# Altium PCB GenericPiHAT 06-1.0.PcbDoc
Units mm, origin at the board's own origin, x right, y up, seen from the top; angles counter-clockwise.
Board outline 65 x 56.5 mm, 2 copper layers (Top Layer, Bottom Layer), stack 1.525 mm thick; 7 components, 32 nets, 62 pads, 0 vias.
Unrouted connection lines stored in the file: 24.
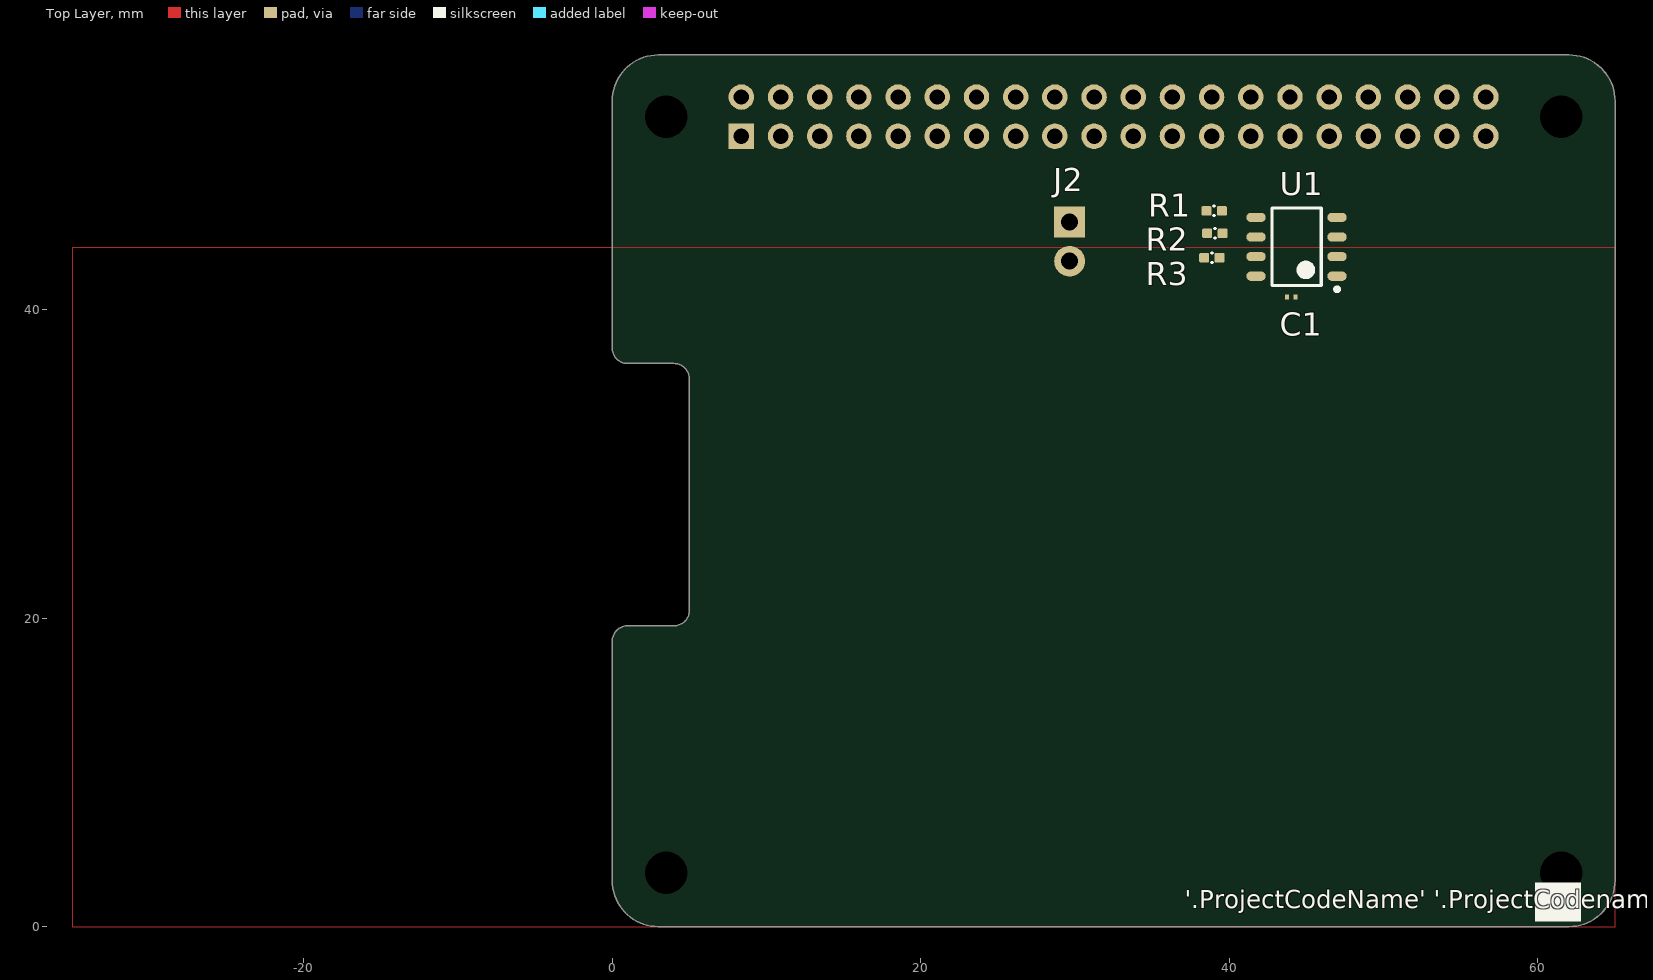
[diagram p0: Top Layer view]
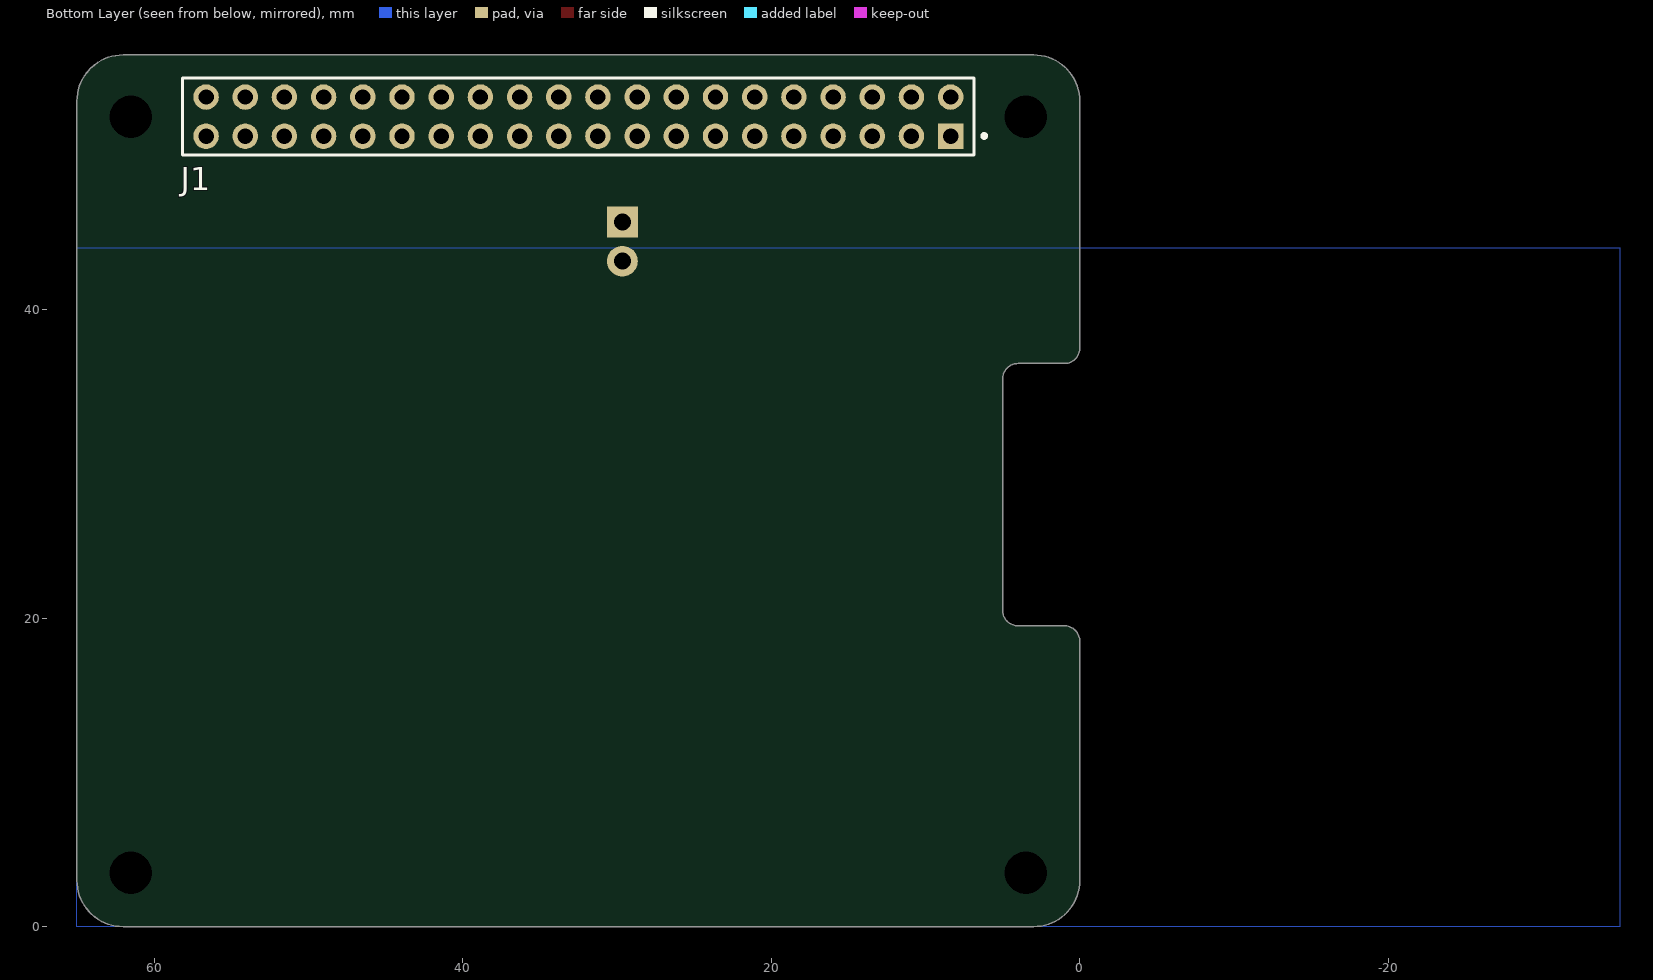
[diagram p1: Bottom Layer view, seen from below]

## Layer stack, top to bottom
Top Solder: solder mask 0.0102, Solder Resist, Dk 3.5
Top Layer: signal copper 0.0356
Dielectric 1: core 1.454, FR-4, Dk 4.2
Bottom Layer: signal copper 0.0356
Bottom Solder: solder mask 0.0102, Solder Resist, Dk 3.5

## Board outline
0,3 0,18.5 cw(c1,18.5) 1,19.5 4,19.5 ccw(c4,20.5) 5,20.5 5,35.5 ccw(c4,35.5) 4,36.5 1,36.5 cw(c1,37.5) 0,37.5 0,53.5 cw(c3,53.5) 3,56.5 62,56.5 cw(c62,53.5) 65,53.5 65,3 cw(c62,3) 62,0 3,0 cw(c3,3)

## Design rules (kind name [scope] priority, off if disabled: settings)
AssemblyTestPointUsage [All] p1: valid=2
BoardOutlineClearance [All] p1: gap=0.3 ignorepadtopadclearanceinfootprint=FALSE except(0: Arc-SplitContinuation Track-SplitContinuation SMDPad-SplitContinuation THPad-SplitContinuation Via-SplitContinuation Fill-SplitContinuation Poly-SplitContinuation Region-SplitContinuation Text-SplitContinuation)
Clearance [All] p1: gap=0.125 ignorepadtopadclearanceinfootprint=FALSE except(0: Arc-Hole Track-Hole SMDPad-Hole THPad-Hole Via-Hole Fill-Hole Poly-Hole Region-Hole Text-Hole)
DiffPairsRouting [All] p1: maxlimit=0.2 minlimit=0.15 mostfreqgap=0.15 toplayer_minwidth=0.15 toplayer_maxwidth=0.2 toplayer_prefwidth=0.15 bottomlayer_minwidth=0.15 bottomlayer_maxwidth=0.2 bottomlayer_prefwidth=0.15 maxuncoupledlength=12.7
FabricationTestPointUsage [All] p1: valid=2 allowmultiple=FALSE
HoleSize [All] p1: absolutevalues=TRUE maxlimit=3 minlimit=0.2 maxpercent=80.000 minpercent=20.000
MinimumSolderMaskSliver [All] p1: minsoldermaskwidth=0.005
PlaneClearance [All] p1: clearance=0.3
PlaneConnect [All] p1: planeconnectstyle=Relief reliefexpansion=0.5 reliefentries=4 reliefconductorwidth=0.2 reliefairgap=0.3
PolygonConnect "PolygonConnect GND" [isVIA] p1: connectstyle=Relief reliefconductorwidth=0.2 reliefentries=4 polygonreliefangle="90 Angle" airgapwidth=0.2
PolygonConnect [All] p2: connectstyle=Relief reliefconductorwidth=0.2 reliefentries=4 polygonreliefangle="90 Angle" airgapwidth=0.2
RoomDefinition "GenericPiHAT 06-1.0" [InComponentClass('GenericPiHAT 06-1.0')] p1: confinementstyle=ConfineIn formatcopy=TRUE lockcomponents=FALSE outline 0,0 65,0 65,56.5 0,56.5
RoutingVias [All] p1: holewidth=0.3 width=0.6 viastyle="Through Hole" minholewidth=0.3 minwidth=0.6 maxholewidth=0.3 maxwidth=0.8
SilkToSilkClearance [All] p1: silktosilkclearance=0.001
SilkToSolderMaskClearance [IsPad] p1: minsilkscreentomaskgap=0.05 clearancetoexposedcopper=TRUE
SolderMaskExpansion [All] p1: expansion=0.075
Width [All] p1: maxlimit=2 minlimit=0.15 preferedwidth=0.15 minimp=50.000000 maximp=50.000000 favimp=50.000000
21 further rules are at their usual default settings.

## Components (designator, comment, footprint, x,y, rotation, side; value= is the part's Value field where it differs from the comment)
C1 "100nF" "TDK 2010" 44.009,40.811 r180 top
J1 "SSW-140-01-G-D" SSW-140-01-G-D 32.5,52.5 r180 bottom
J2 "0.1\" DNF" "Generic 1x2 2.54mm header" 29.645,44.399 r90 top
R1 "3k9" RES0402 39.015,46.394 r0 top
R2 "3k9" RES0402 39.065,44.936 r0 top
R3 "1k" RES0402 38.866,43.354 r0 top
U1 "CAT24C32WI-GT3" ONSC-SOIC-8-751BD-01_L 44.355,44.064 r180 top

## Footprints (in the part's own frame and the unit in brackets; to place one, negate y for a bottom-side part, rotate by r counter-clockwise, add the part's x,y. Pads: shape width x height; smd on the part's side, far side on the other; paste and mask are expansions set on the pad)
"Generic 1x2 2.54mm header" [mm] "1x2 2.54mm  0.1\" header vertial TH header"
  rect 2x2 hole 1.1: 1(1.27,0)
  round 2 hole 1.1: 2(-1.27,0)
  body extent -2.54,-1.27 2.54,1.27, height 8.65
ONSC-SOIC-8-751BD-01_L [mm] "SOIC, 8-Leads, Body 4.90x3.90mm, Pitch 1.27mm, IPC High Density"
  oval 1.25x0.6 smd: 1(-2.625,1.905) 2(-2.625,0.635) 3(-2.625,-0.635) 4(-2.625,-1.905) 5(2.625,-1.905) 6(2.625,-0.635) 7(2.625,0.635) 8(2.625,1.905)
  silkscreen extent -2.75,-2.5 1.6,2.88, body extent -3,-2.5 3,2.5, height 1.75
RES0402 [mm] "Chip Resistor 0402"
  rrect25% 0.65x0.6 smd: 1(-0.5,0) 2(0.5,0)
  silkscreen extent -0.03,-0.3 0.03,0.3, body extent -0.53,-0.28 0.53,0.27, height 0.35
SSW-140-01-G-D [mm]
  rect 1.65x1.65 / inner round 1.65 / far side rect 1.65x1.65 hole 1 mask+0: 1(24.13,-1.27)
  round 1.65 hole 1 mask+0: 2(24.13,1.27) 3(21.59,-1.27) 4(21.59,1.27) 5(19.05,-1.27) 6(19.05,1.27) 7(16.51,-1.27) 8(16.51,1.27) 9(13.97,-1.27) 10(13.97,1.27) 11(11.43,-1.27) 12(11.43,1.27) 13(8.89,-1.27) 14(8.89,1.27) 15(6.35,-1.27) 16(6.35,1.27) 17(3.81,-1.27) 18(3.81,1.27) 19(1.27,-1.27) 20(1.27,1.27) 21(-1.27,-1.27) 22(-1.27,1.27) 23(-3.81,-1.27) 24(-3.81,1.27) 25(-6.35,-1.27) 26(-6.35,1.27) 27(-8.89,-1.27) 28(-8.89,1.27) 29(-11.43,-1.27) 30(-11.43,1.27) 31(-13.97,-1.27) 32(-13.97,1.27) 33(-16.51,-1.27) 34(-16.51,1.27) 35(-19.05,-1.27) 36(-19.05,1.27) 37(-21.59,-1.27) 38(-21.59,1.27) 39(-24.13,-1.27) 40(-24.13,1.27)
  silkscreen extent -25.65,-2.5 26.42,2.5, body extent -25.65,-2.48 25.65,2.48, height 8.51
"TDK 2010" [mm]
  rect 0.25x0.3 smd mask+0.075: 1(-0.275,0) 2(0.275,0)
  body extent -0.3,-0.15 0.3,0.15, height 0.3

## Part data
C1: library part "100nF 0201 10V", "CAP CER 0.1UF 10V X5R 0201", Capacitance=0.10µF, Manufacturer="TDK Corporation", Manufacturer Part Number=C0603X5R1A104K030BC, Operating Temperature="-55°C ~ 85°C", Package / Case="0201 (0603 Metric)", Ratings=-, Supplier Part Number 1=445-7318-1-ND, Temperature Coefficient=X5R, Tolerance=±10%, Voltage - Rated=10V, Applications="General Purpose", Category=Capacitors, ComponentLink1Description=https://product.tdk.com/info/en/catalog/datasheets/mlcc_commercial_general_en.pdf, ComponentLink1URL=https://product.tdk.com/info/en/catalog/datasheets/mlcc_commercial_general_en.pdf, Features="Low ESL", Height - Seated (Max)=-, Lead Spacing=-, Lead Style=-, Mounting Type="Surface Mount, MLCC", Packaging="Cut Tape (CT)", Pricing 1="1=0.07, 10=0.034, 100=0.0157, 250=0.01288, 500=0.01102, 1000=0.00858, 5000=0.00715 (GBP)", RoHS="RoHS Compliant", Size / Dimension="0.024\" L x 0.012\" W (0.60mm x 0.30mm)", Stock 1=6306784, Supplier 1=Digi-Key, Thickness (Max)="0.013\" (0.33mm)"
J1: "CONN RCPT .100\" 40POS DUAL", Color=Black, Contact Resistance=10mR, Current Rating=6.9A, Manufacturer=Samtec, Max Operating Temperature=125°C, Max Voltage Rating (AC)=550V, Min Operating Temperature=-55°C, Supplier Part Number 1=SAM1208-40-ND, ComponentLink1Description="samtec catalogue page online", ComponentLink1URL=http://suddendocs.samtec.com/catalog_english/ssw_th.pdf, ComponentLink2Description="samtec drawing online", ComponentLink2URL=http://suddendocs.samtec.com/prints/ssw-1xx-xx-xxx-x-xx-xxx-xx-mkt.pdf, Connector Type=Receptacle,Socket, Contact Material=Bronze, Contact Plating=Gold, Gender=Receptacle, Housing Color=Black, Housing Material=Plastic, Lead Free="Lead Free", Manufacturer Part Number=SSW-140-01-G-D, Max Current Rating=6.9A, Mount="Through Hole", Number of Contacts=80, Number of Positions=80, Number of Rows=2, Orientation=Straight, Packaging=Bulk, Pitch=2.54mm, Pricing 1="1=9.87000, 10=9.44100, 25=8.58240, 50=8.15320, 100=7.93870, 250=7.08048, 500=6.65136 (USD)", Radiation Hardening=No, REACH SVHC="No SVHC", RoHS=Yes, Row Spacing=0.1inch, Stock 1=0, Supplier 1=Digi-Key, Supplier 2=Farnell, Supplier 3=Mouser, Supplier 4=RSComponents, Supplier Part Number 2=1668412, Supplier Part Number 3=200-SSW14001GD, Supplier Part Number 4=7655859, Termination=Solder, Voltage Rating=550V
J2: library part "Header Multicomp 2211S-02G-whitesch", "2.54mm, 2x1 way, vertical, square pin, gold plate", Manufacturer=MULTICOMP, Manufacturer Part Number=2211S-02G, Supplier Part Number 1=1593411, ComponentLink1Description="header strip datasheet", ComponentLink1URL=http://www.farnell.com/datasheets/1518407.pdf, Pricing 1="100=0.0203, 500=0.0146, 1000=0.0122, 2500=0.011, 5000=0.0099, 10000=0.0086 (GBP)", RoHS=YES, Stock 1=168174, Supplier 1=Farnell
R1 R2: library part RES0402_GENERIC, "Generic 0402 Chip Resistor 3k9", Case=0402
R3: library part RES0402_GENERIC, "Generic 0402 Chip Resistor 1k", Case=0402
U1: Case/Package=SOIC, Frequency=400kHz, Manufacturer="ON Semiconductor", Manufacturer Part Number=CAT24C32WIGT3, Max Frequency=100kHz, Max Operating Temperature=85°C, Max Supply Voltage=5.5V, Min Operating Temperature=-40°C, Min Supply Voltage=1.7V, Nominal Supply Current=2mA, Operating Supply Voltage=5V, Package Quantity=1, Supplier Part Number 1=CAT24C32WI-GT3CT-ND, Access Time=3500ns, ComponentLink1Description="On Semi datasheet online", ComponentLink1URL=https://www.onsemi.com/pub/Collateral/CAT24C32-D.PDF, Contact Plating=Gold, Density=32Kb, Halogen Free="Halogen Free", Height=1.5mm, Interface=I2C,Serial,2-Wire, Lead Free="Lead Free", Length=5mm, Memory Size=32Kb, Memory Type=EEPROM, Mount="Surface Mount", Number of Pins=8, Number of Words=4096, Packaging="Tape and Reel", Pricing 1="1=0.200000, 10=0.197000, 100=0.161900, 500=0.157360, 1000=0.153150 (USD)", Radiation Hardening=No, REACH SVHC="No SVHC", RoHS=Yes, Stock 1=37111, Supplier 1=Digi-Key, Supplier 2=Farnell, Supplier 3=Mouser, Supplier 4=RSComponents, Supplier Part Number 2=2306646, Supplier Part Number 3=698-CAT24C32WI-GT3, Supplier Part Number 4=7814828, Width=4mm

## Free pads (board coordinates)
  round 0 hole 2.75 unplated mask+3.1: 7(3.5,3.5) 7(3.5,52.5) 7(61.5,3.5) 7(61.5,52.5)

## Nets (pads, with @x,y where several pads share a name; then routed paths per layer and width w, separated by ;. In a path a pad name is that pad's centre, name@x,y a point inside that pad or via, vN(x,y) a via of type N, cw(c..) or ccw(c..) an arc to the next point about the centre after c; other vN are vias at no path point)
3V3: C1.2 J1.1 J1.17 R1.1 R2.1 R3.1 U1.8
5V0: J1.2 J1.4
GND: C1.1 J1.6 J1.9 J1.14 J1.20 J1.25 J1.30 J1.34 J1.39 J2.1 U1.1 U1.2 U1.3 U1.4
NetJ2_2: J2.2 R3.2 U1.7
RPI_GPIO0: J1.27 R1.2 U1.5
RPI_GPIO1: J1.28 R2.2 U1.6
RPI_GPIO2: J1.3
RPI_GPIO3: J1.5
RPI_GPIO4: J1.7
RPI_GPIO5: J1.29
RPI_GPIO6: J1.31
RPI_GPIO7: J1.26
RPI_GPIO8: J1.24
RPI_GPIO9: J1.21
RPI_GPIO10: J1.19
RPI_GPIO11: J1.23
RPI_GPIO12: J1.32
RPI_GPIO13: J1.33
RPI_GPIO14: J1.8
RPI_GPIO15: J1.10
RPI_GPIO16: J1.36
RPI_GPIO17: J1.11
RPI_GPIO18: J1.12
RPI_GPIO19: J1.35
RPI_GPIO20: J1.38
RPI_GPIO21: J1.40
RPI_GPIO22: J1.15
RPI_GPIO23: J1.16
RPI_GPIO24: J1.18
RPI_GPIO25: J1.22
RPI_GPIO26: J1.37
RPI_GPIO27: J1.13

## Polygon pours and split planes (outlines as drawn)
GND on Top Layer "Top Layer-GND" (solid, remove dead copper, shelved, pour order 4): -35,44 -35,0 65,0 65,44
GND on Bottom Layer "Bottom Layer-GND" (solid, remove dead copper, shelved, pour order 2): -35,44 -35.008,0 65,0 65,44

## Silkscreen, mask and mechanical layers (free items; w line width, h text height)
Top Overlay:
  rectangle: 59.8,0.346 62.8,2.846
  text "'.ProjectCodeName' '.ProjectCodenameID'-'.ProjectRevision'" at 37.099,0.796 h2
Board Outline:
  lines w0.254: 0,3 ccw(c3,3) 3,0 62,0 ccw(c62,3) 65,3 65,53.5 ccw(c62,53.5) 62,56.5 3,56.5 ccw(c3,53.5) 0,53.5 0,37.5 ccw(c1,37.5) 1,36.5 4,36.5 cw(c4,35.5) 5,35.5 5,20.5 cw(c4,20.5) 4,19.5 1,19.5 ccw(c1,18.5) 0,18.5 0,3
  lines w2: 45,4 45,19
Top Assy:
  lines w0.1: -28.55,38.005 -28.55,38.005